# Altium PCB PCB1.PcbDoc
Units mil, origin at the board's own origin, x right, y up, seen from the top; angles counter-clockwise.
Board outline 2030 x 1155 mil, 2 copper layers (Top Layer, Bottom Layer); 37 components, 27 nets, 158 pads, 111 vias.
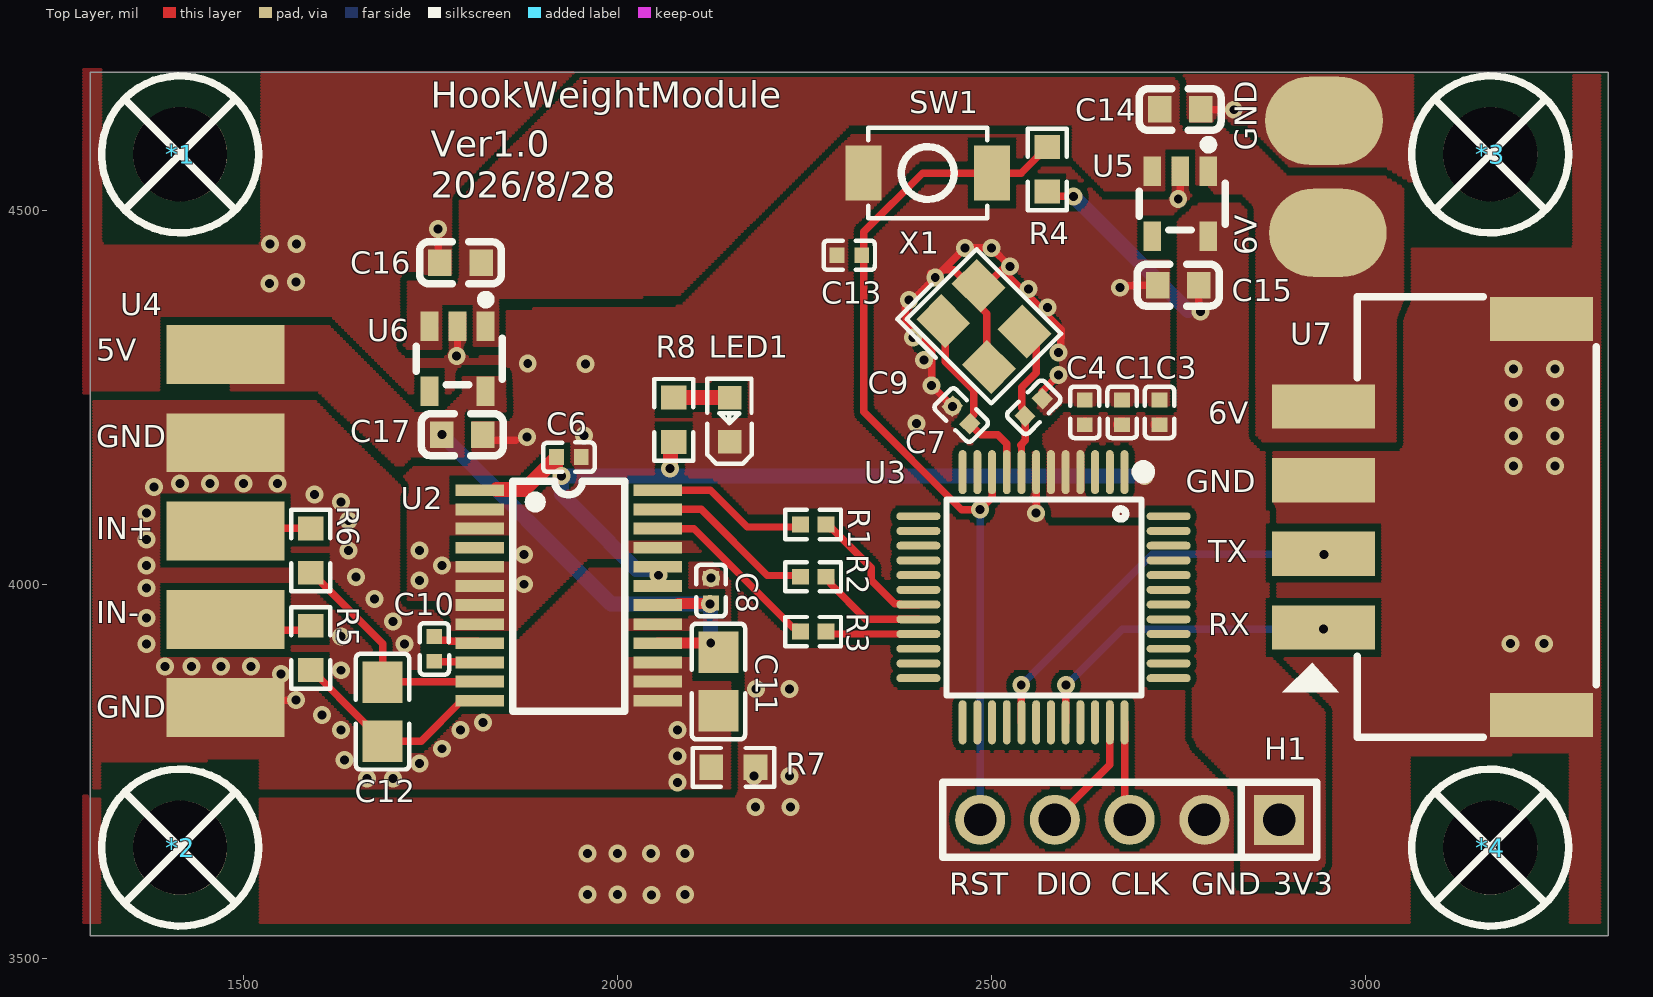
[diagram p0: Top Layer view]
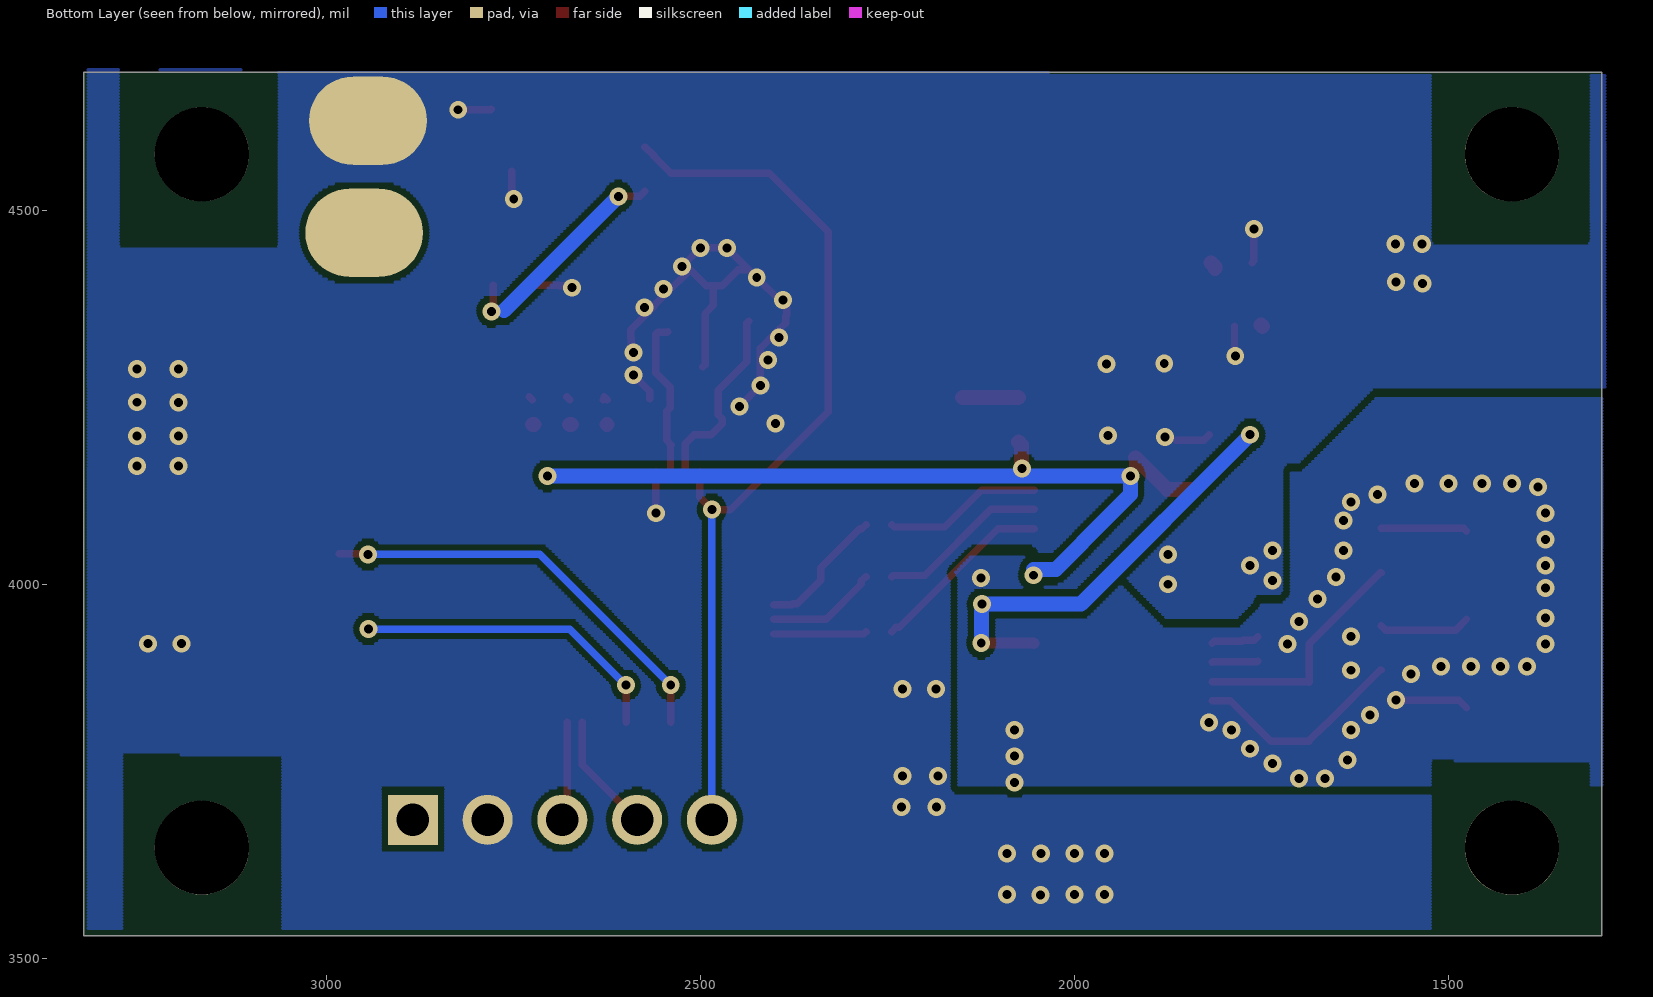
[diagram p1: Bottom Layer view, seen from below]

## Layer stack, top to bottom
Top Solder: solder mask 0.4, Solder Resist, Dk 3.5
Top Layer: signal copper 1.4
Dielectric 1: dielectric 12.6, FR-4, Dk 4.8
Bottom Layer: signal copper 1.4
Bottom Solder: solder mask 0.4, Solder Resist, Dk 3.5

## Board outline
1295,3530 1295,4685 3325,4685 3325,3530

## Design rules (kind name [scope] priority, off if disabled: settings)
Clearance [All] p1: gap=8 ignorepadtopadclearanceinfootprint=FALSE
ComponentClearance [All] p1: gap=0 collisioncheckmode=3 verticalgap=0 showdistances=FALSE
HoleSize [All] p1: absolutevalues=TRUE maxlimit=130 minlimit=1 maxpercent=80.000 minpercent=20.000
MinimumSolderMaskSliver [All] p1: minsoldermaskwidth=4
PlaneConnect [All] p1: planeconnectstyle=Direct reliefexpansion=20 reliefentries=4 reliefconductorwidth=10 reliefairgap=10
PolygonConnect [All] p1: connectstyle=Direct reliefconductorwidth=10 reliefentries=4 polygonreliefangle="90 Angle" airgapwidth=10
RoutingVias [All] p1: holewidth=28 width=50 viastyle="Through Hole" minholewidth=28 minwidth=50 maxholewidth=28 maxwidth=50
SilkToSilkClearance [All] p1: silktosilkclearance=2
SilkToSolderMaskClearance [IsPad] p1: minsilkscreentomaskgap=2 clearancetoexposedcopper=TRUE
SolderMaskExpansion [All] p1: expansion=0 istentingtop=FALSE
SupplyNets "Schematic Supply Nets_2" [InNet('6V')] p1: voltage=0.000
SupplyNets "Schematic Supply Nets" [InNet('3V3')] p2: voltage=0.000
SupplyNets "Schematic Supply Nets_4" [InNet('5V')] p3: voltage=0.000
SupplyNets "Schematic Supply Nets_3" [InNet('DGND')] p4: voltage=0.000
SupplyNets "Schematic Supply Nets_1" [InNet('AGND')] p5: voltage=0.000
Width [All] p1: maxlimit=50 minlimit=10 preferedwidth=10
24 further rules are at their usual default settings.

## Components (designator, comment, footprint, x,y, rotation, side; value= is the part's Value field where it differs from the comment)
*1 "螺丝孔_1" M3螺丝 1415,4575 r0 top
*2 "螺丝孔_1" M3螺丝 1415,3647.74 r0 top
*3 "螺丝孔_1" M3螺丝 3167.2,4575 r0 top
*4 "螺丝孔_1" M3螺丝 3167.2,3647.74 r0 top
C1 "cc0402krx7r7bb104" C0402 2675,4230 r90 top value=100nF
C3 "cc0402krx7r7bb104" C0402 2725,4230 r90 top value=100nF
C4 "cc0402krx7r7bb104" C0402 2625,4230 r270 top value=100nF
C6 "cc0402krx7r7bb104" C0402 1935,4170 r0 top value=100nF
C7 "cc0402jrnpo9bn180" C0402 2556.7,4236.7 r45 top value=18pF
C8 "cc0402krx7r7bb104" C0402 2125,3991.54 r90 top value=100nF
C9 "cc0402jrnpo9bn180" C0402 2459.68,4226.29 r315 top value=18pF
C10 "cc0402krx7r7bb104" C0402 1755,3913.46 r90 top value=100nF
C11 "cl21b103kbannnc" C0805 2135,3870 r270 top value=10nF
C12 "cl21b103kbannnc" C0805 1685.78,3829.55 r270 top value=10nF
C13 "cc0402krx7r7bb104" C0402 2310,4440 r0 top value=100nF
C14 "cga0603x5r105k500jt" C0603 2752.56,4635 r0 top value=1uF
C15 "cga0603x5r105k500jt" C0603 2750,4400 r180 top value=1uF
C16 "cga0603x5r105k500jt" C0603 1790,4430 r180 top value=1uF
C17 "cga0603x5r105k500jt" C0603 1792.44,4200 r0 top value=1uF
H1 "pz254v-11-05p" HDR-TH_5P-P2.54-V-M 2685,3685 r180 top
LED1 "ltst-c190kskt" LED0603-RD 2150,4220 r90 top
R1 "frc0402f47r0ts" R0402 2261.76,4079.9 r0 top value=47Ω
R2 "frc0402f47r0ts" R0402 2261.76,4010.1 r0 top value=47Ω
R3 "frc0402f47r0ts" R0402 2261.76,3936.58 r0 top value=47Ω
R4 "frc0603f1002ts" R0603 2575,4555 r270 top value=10kΩ
R5 "frc0603f1000ts" R0603 1590,3915 r270 top value=100Ω
R6 "frc0603f1000ts" R0603 1590,4045 r270 top value=100Ω
R7 "0603waf0000t5e" R0603 2155,3755 r0 top value=0Ω
R8 "0603waf1001t5e" R0603 2075,4220 r270 top value=1kΩ
SW1 "ts-1088-ar02016" SW-SMD_L3.9-W3.0-P4.45 2415,4550 r0 top
U2 "ads1232ipwr" TSSOP-24_L7.8-W4.4-P0.65-LS6.4-BL 1935,3985 r270 top
U3 "stm32g031c8t6" LQFP-48_L7.0-W7.0-P0.50-LS9.0-BL 2569.84,3982.68 r180 top
U4 "5个焊盘" "5个焊盘 - duplicate" 1475.75,4307.38 r270 top
U5 "tps7a2033pdbvr" SOT-23-5_L2.9-W1.6-P0.95-LS2.8-BR 2752.56,4508.8 r90 top
U6 "tps7a2050pdbvr" SOT-23-5_L2.9-W1.6-P0.95-LS2.8-BR 1786.01,4301.56 r90 top
U7 "bx-xh2.54-4pwt" CONN-SMD_4P-P2.50_BX-XH2.54-4PWT 3090,4090 r90 top
X1 "x32258mob4si" CRYSTAL-SMD_4P-L3.2-W2.5-BL 2490,4345 r315 top value=8MHz

## Footprints (in the part's own frame and the unit in brackets; to place one, negate y for a bottom-side part, rotate by r counter-clockwise, add the part's x,y. Pads: shape width x height; smd on the part's side, far side on the other; paste and mask are expansions set on the pad)
"5个焊盘 - duplicate" [mm]
  rect 2x4 smd: 1(0,0) 2(3,0) 3(6.001,0) 4(9,0) 5(12,0)
C0402 [mm]
  rect 0.5x0.54 smd: 1(-0.42,0) 2(0.42,0)
  silkscreen extent -0.87,-0.5 0.87,0.5
C0603 [mm]
  rect 0.8x0.9 smd: 1(-0.7,0) 2(0.7,0)
  silkscreen extent -1.39,-0.71 1.39,0.71
C0805 [mm]
  rect 1.41x1.35 smd paste-100 mask+0.051: 1(-1,0) 2(1,0)
  silkscreen extent -1.96,-0.9 1.96,0.9
CONN-SMD_4P-P2.50_BX-XH2.54-4PWT [mm]
  rect 1.5x3.5 smd paste+0 mask+0.05: 1(-3.75,3.7) 2(-1.25,3.7) 3(1.25,3.7) 4(3.75,3.7) 5(6.73,-3.7) 6(-6.73,-3.7)
  silkscreen extent -7.49,-5.57 7.49,5.1
CRYSTAL-SMD_4P-L3.2-W2.5-BL [mm]
  rect 1.4x1.2 smd: 1(-1.1,-0.85) 2(1.1,-0.85) 3(1.1,0.85) 4(-1.1,0.85)
  silkscreen extent -2.26,-1.91 2.03,1.68
HDR-TH_5P-P2.54-V-M [mm]
  rect 1.7x1.7 hole 1.1: 1(-5.08,0)
  round 1.7 hole 1.1: 2(-2.54,0) 3(0,0) 4(2.54,0) 5(5.08,0)
  silkscreen extent -6.35,-1.27 6.35,1.27
LED0603-RD [mm]
  rect 0.8x0.8 smd: 1(-0.749,0) 2(0.749,0)
  silkscreen extent -1.49,-0.75 1.39,0.76
LQFP-48_L7.0-W7.0-P0.50-LS9.0-BL [mm]
  oval 0.27x1.5 smd paste+0 mask+0.05: 1(-2.75,-4.25) 2(-2.25,-4.25) 3(-1.75,-4.25) 4(-1.25,-4.25) 5(-0.75,-4.25) 6(-0.25,-4.25) 7(0.25,-4.25) 8(0.75,-4.25) 9(1.25,-4.25) 10(1.75,-4.25) 11(2.25,-4.25) 12(2.75,-4.25) 25(2.75,4.25) 26(2.25,4.25) 27(1.75,4.25) 28(1.25,4.25) 29(0.75,4.25) 30(0.25,4.25) 31(-0.25,4.25) 32(-0.75,4.25) 33(-1.25,4.25) 34(-1.75,4.25) 35(-2.25,4.25) 36(-2.75,4.25)
  oval 1.5x0.27 smd paste+0 mask+0.05: 13(4.25,-2.75) 14(4.25,-2.25) 15(4.25,-1.75) 16(4.25,-1.25) 17(4.25,-0.75) 18(4.25,-0.25) 19(4.25,0.25) 20(4.25,0.75) 21(4.25,1.25) 22(4.25,1.75) 23(4.25,2.25) 24(4.25,2.75) 37(-4.25,2.75) 38(-4.25,2.25) 39(-4.25,1.75) 40(-4.25,1.25) 41(-4.25,0.75) 42(-4.25,0.25) 43(-4.25,-0.25) 44(-4.25,-0.75) 45(-4.25,-1.25) 46(-4.25,-1.75) 47(-4.25,-2.25) 48(-4.25,-2.75)
  silkscreen extent -3.59,-4.46 3.3,3.34
M3螺丝 [mil]
  round 126 hole 126 paste-99999 mask+4: 1(0,0)
  silkscreen extent -105,-105 105,105
R0402 [mm]
  rect 0.566x0.54 smd paste-100 mask+0.051: 1(-0.433,0) 2(0.433,0)
  silkscreen extent -0.94,-0.5 0.94,0.5
R0603 [mil]
  rect 31.75x34.02 smd paste-3937.01 mask+2: 1(-29.66,0) 2(29.66,0)
  silkscreen extent -55,-26 55,26
SOT-23-5_L2.9-W1.6-P0.95-LS2.8-BR [mm]
  rect 1x0.6 smd paste+0 mask+0.05: 1(1.1,-0.95) 2(1.1,0) 3(1.1,0.95) 4(-1.1,0.95) 5(-1.1,-0.95)
  silkscreen extent -0.89,-1.52 2.16,1.4
SW-SMD_L3.9-W3.0-P4.45 [mm]
  rect 1.23x1.86 smd: 1(-2.185,0) 2(2.185,0)
  silkscreen extent -2.03,-1.54 2.03,1.54
TSSOP-24_L7.8-W4.4-P0.65-LS6.4-BL [mm]
  rect 0.4x1.65 smd: 1(-3.575,-3.023) 2(-2.925,-3.023) 3(-2.275,-3.023) 4(-1.625,-3.023) 5(-0.975,-3.023) 6(-0.325,-3.023) 7(0.325,-3.023) 8(0.975,-3.023) 9(1.625,-3.023) 10(2.275,-3.023) 11(2.925,-3.023) 12(3.575,-3.023) 13(3.575,3.023) 14(2.925,3.023) 15(2.275,3.023) 16(1.625,3.023) 17(0.975,3.023) 18(0.325,3.023) 19(-0.325,3.023) 20(-0.975,3.023) 21(-1.625,3.023) 22(-2.275,3.023) 23(-2.925,3.023) 24(-3.575,3.023)
  silkscreen extent -3.89,-1.91 3.94,1.9

## Part data
C1 C3 C4 C6 C8 C10 C13: "容值:100nF;精度:±10%;额定电压:16V;温度系数:X7R;", JLCPCB Part Class="Extended Part", LCSC Part Name="100nF ±10% 16V", Manufacturer=YAGEO(国巨), ManufacturerPart=CC0402KRX7R7BB104, Temperature Coefficient=X7R, Tolerance=±10%, Voltage Rating=16V, AddInBom=yes, ConvertToPcb=yes, Datasheet=https://item.szlcsc.com/datasheet/CC0402KRX7R7BB104/61526.html, FootprintName=C0402, ModelId=36a51122f27c49738f86b3bfa98863e0, ModelName=C0402_L1.0-W0.5-H0.5, ModelTransform=39.37,19.685,0,0,0,0,0,0,0, Supplier=LCSC, Supplier Footprint=0402, SupplierPart=C60474, Symbol=CC0402KRX7R7BB104
C7 C9: "容值:18pF;精度:±5%;额定电压:50V;温度系数:NP0;", JLCPCB Part Class="Extended Part", LCSC Part Name="18pF ±5% 50V", Manufacturer=YAGEO(国巨), ManufacturerPart=CC0402JRNPO9BN180, Temperature Coefficient=NP0, Tolerance=±5%, Voltage Rating=50V, AddInBom=yes, ConvertToPcb=yes, Datasheet=https://item.szlcsc.com/datasheet/CC0402JRNPO9BN180/107417.html, FootprintName=C0402, ModelId=36a51122f27c49738f86b3bfa98863e0, ModelName=C0402_L1.0-W0.5-H0.5, ModelTransform=39.37,19.685,0,0,0,0,0,0,0, Supplier=LCSC, Supplier Footprint=0402, SupplierPart=C106202, Symbol=CC0402JRNPO9BN180
C11 C12: "容值:10nF;精度:±10%;额定电压:50V;温度系数:X7R;", JLCPCB Part Class="Basic Part", LCSC Part Name="10nF ±10% 50V", Manufacturer=SAMSUNG(三星), ManufacturerPart=CL21B103KBANNNC, Temperature Coefficient=X7R, Tolerance=±10%, Voltage Rating=50V, AddInBom=yes, ConvertToPcb=yes, Datasheet=https://item.szlcsc.com/datasheet/CL21B103KBANNNC/2062.html, FootprintName=C0805, ModelId=1ba041120af144c991958decab20d241, ModelName=C0805_L2.0-W1.3-H1.3, ModelTransform=78.74,51.181,0,0,0,0,0,0.0005,0, Supplier=LCSC, Supplier Footprint=0805, SupplierPart=C1710, Symbol=CL21B103KBANNNC
C14 C15 C16 C17: "容值:1uF;精度:±10%;额定电压:50V;温度系数:X5R;", JLCPCB Part Class="Extended Part", LCSC Part Name="1uF ±10% 50V 停产", Manufacturer=HRE(芯声), ManufacturerPart=CGA0603X5R105K500JT, Temperature Coefficient=X5R, Tolerance=±10%, Voltage Rating=50V, AddInBom=yes, ConvertToPcb=yes, Datasheet=https://item.szlcsc.com/datasheet/CGA0603X5R105K500JT/7062558.html, FootprintName=C0603, ModelId=ac125912035d415993ca9572d50418b1, ModelName=C0603_L1.6-W0.8-H0.8, ModelTransform=62.992,31.496,0,0,0,0,0,0,0, Supplier=LCSC, Supplier Footprint=0603, SupplierPart=C6119852, Symbol=CGA0603X5R105K500JT
H1: "插针结构:1x5P;间距:2.54mm;行距:-;圆针/方针:方针;安装方式:直插;排数:单排;总PIN位数:5P;额定电流:3A;额定电压:250V;配合针长度:6mm;塑高:2.5mm;端接针长度:3mm;触头材质:黄铜;触头镀层:-;工作温度:-40℃~+105℃;颜色:黑色;", Color=黑色, Current Rating=3A, JLCPCB Part Class="Extended Part", LCSC Part Name="1x5P 间距:2.54mm 方针 直插", Manufacturer=XFCN(兴飞), ManufacturerPart=PZ254V-11-05P, Operating Temperature=-40℃~+105℃, Voltage Rating (Max)=250V, AddInBom=yes, Circluar Pins/Square Pins=方针, Contact Material=黄铜, Contact Plating=-, ConvertToPcb=yes, Datasheet=https://item.szlcsc.com/datasheet/PZ254V-11-05P/502960.html, FootprintName=HDR-TH_5P-P2.54-V-M, Insulation Height=2.5mm, Length of End Connection Pin=3mm, Length of Mating Pin=6mm, ModelId=47d466e4a34f4fc5bc626cf773a24dd5, ModelName=HDR-TH_5P-P2.54-M-LI-1X5P, ModelTransform=499.999,100,0,0,0,0,0,0,-118.11, Mounting Type=直插, Number of Pins=5P, Number of Rows=单排, Pin Structure=1x5P, Pitch=2.54mm, Row Spacing=-, Supplier=LCSC, Supplier Footprint=插件,P=2.54mm, SupplierPart=C492404, Symbol=PZ254V-11-05P
LED1: "灯头类型:-;发光颜色:黄色;正向压降(Vf):2.1V;功率:75mW;正向电流:20mA;波长:584.5nm~597nm;二极管配置:独立二极管;透镜颜色:无色透明透镜;色温:-;发光强度:104mcd;发光角度:130°;载带方式:-;工作温度:-30℃~+85℃;", Color Temperature=-, Forward Current=20mA, Illumination Color=黄色, JLCPCB Part Class="Extended Part", LCSC Part Name=黄灯, Lens Color=无色透明透镜, Manufacturer=LITEON(光宝), ManufacturerPart=LTST-C190KSKT, Operating Temperature=-30℃~+85℃, Power(Watts)=75mW, Voltage - Forward(Vf)=2.1V, AddInBom=yes, ConvertToPcb=yes, Datasheet=https://item.szlcsc.com/datasheet/LTST-C190KSKT/136371.html, Diode Configuration=独立二极管, FootprintName=LED0603-RD, Lamp Holder Type=-, Luminous Intensity=104mcd, ModelId=1f0d29a91be547639d425604e9b96ebb, ModelName=LED0603-RD, ModelTransform=63.7794,32.283,0,0,0,0,0,0,0, Mounting Style=-, Peak Wavelength=588nm, Supplier=LCSC, Supplier Footprint=0603, SupplierPart=C125095, Symbol=LTST-C190KSKT, Viewing Angle=130°, Wavelength - Dominant=584.5nm~597nm
R1 R2 R3: "电阻类型:厚膜电阻;阻值:47Ω;精度:±1%;功率:62.5mW;工作电压:50V;温度系数:±100ppm/℃;", JLCPCB Part Class="Extended Part", LCSC Part Name="47Ω ±1% 62.5mW 厚膜电阻", Manufacturer=FOJAN(富捷), ManufacturerPart=FRC0402F47R0TS, Operating Temperature=-55℃~+155℃, Power(Watts)=62.5mW, Temperature Coefficient=±100ppm/℃, Tolerance=±1%, Voltage-Supply(Max)=50V, AddInBom=yes, ConvertToPcb=yes, Datasheet=https://item.szlcsc.com/datasheet/FRC0402F47R0TS/3186297.html, FootprintName=R0402, ModelId=98c88bc2b9094f218f3a3e30a7012738, ModelName=R0402_L1.0-W0.5-H0.4, ModelTransform=39.37,19.685,0,0,0,0,0,0,0, Supplier=LCSC, Supplier Footprint=0402, SupplierPart=C2909362, Symbol=FRC0402F47R0TS, Type=厚膜电阻
R4: "电阻类型:厚膜电阻;阻值:10kΩ;精度:±1%;功率:100mW;工作电压:75V;温度系数:±100ppm/℃;", JLCPCB Part Class="Extended Part", LCSC Part Name="10kΩ ±1% 100mW 厚膜电阻", Manufacturer=FOJAN(富捷), ManufacturerPart=FRC0603F1002TS, Operating Temperature=-55℃~+155℃, Power(Watts)=100mW, Temperature Coefficient=±100ppm/℃, Tolerance=±1%, Voltage-Supply(Max)=75V, AddInBom=yes, ConvertToPcb=yes, Datasheet=https://item.szlcsc.com/datasheet/FRC0603F1002TS/3180495.html, FootprintName=R0603, ModelId=fc143cca1e79419f9cd78b61e9279f08, ModelName=R0603, ModelTransform=31.8897,63.7794,0,90,0,0,0,0,0, Supplier=LCSC, Supplier Footprint=0603, SupplierPart=C2906982, Symbol=FRC0603F1002TS, Type=厚膜电阻
R5 R6: "电阻类型:厚膜电阻;阻值:100Ω;精度:±1%;功率:100mW;工作电压:75V;温度系数:±100ppm/℃;", JLCPCB Part Class="Extended Part", LCSC Part Name="100Ω ±1% 100mW 厚膜电阻", Manufacturer=FOJAN(富捷), ManufacturerPart=FRC0603F1000TS, Operating Temperature=-55℃~+155℃, Power(Watts)=100mW, Temperature Coefficient=±100ppm/℃, Tolerance=±1%, Voltage-Supply(Max)=75V, AddInBom=yes, ConvertToPcb=yes, Datasheet=https://item.szlcsc.com/datasheet/FRC0603F1000TS/3180494.html, FootprintName=R0603, ModelId=fc143cca1e79419f9cd78b61e9279f08, ModelName=R0603, ModelTransform=31.8897,63.7794,0,90,0,0,0,0,0, Supplier=LCSC, Supplier Footprint=0603, SupplierPart=C2906981, Symbol=FRC0603F1000TS, Type=厚膜电阻
R7: "电阻类型:厚膜电阻;阻值:0Ω;精度:±1%;功率:100mW;工作电压:75V;温度系数:-;", JLCPCB Part Class="Basic Part", LCSC Part Name="0Ω ±1% 100mW 厚膜电阻", Manufacturer=UNI-ROYAL(厚声), ManufacturerPart=0603WAF0000T5E, Operating Temperature=-55℃~+155℃, Power(Watts)=100mW, Temperature Coefficient=-, Tolerance=±1%, Voltage-Supply(Max)=75V, AddInBom=yes, ConvertToPcb=yes, Datasheet=https://item.szlcsc.com/datasheet/0603WAF0000T5E/21903.html, FootprintName=R0603, ModelId=fc143cca1e79419f9cd78b61e9279f08, ModelName=R0603, ModelTransform=31.8897,63.7794,0,90,0,0,0,0,0, Supplier=LCSC, Supplier Footprint=0603, SupplierPart=C21189, Symbol=0603WAF0000T5E, Type=厚膜电阻
R8: "电阻类型:厚膜电阻;阻值:1kΩ;精度:±1%;功率:100mW;工作电压:75V;温度系数:±100ppm/℃;", JLCPCB Part Class="Basic Part", LCSC Part Name="1kΩ ±1% 100mW 厚膜电阻", Manufacturer=UNI-ROYAL(厚声), ManufacturerPart=0603WAF1001T5E, Operating Temperature=-55℃~+155℃, Power(Watts)=100mW, Temperature Coefficient=±100ppm/℃, Tolerance=±1%, Voltage-Supply(Max)=75V, AddInBom=yes, ConvertToPcb=yes, Datasheet=https://item.szlcsc.com/datasheet/0603WAF1001T5E/21904.html, FootprintName=R0603, ModelId=fc143cca1e79419f9cd78b61e9279f08, ModelName=R0603, ModelTransform=31.8897,63.7794,0,90,0,0,0,0,0, Supplier=LCSC, Supplier Footprint=0603, SupplierPart=C21190, Symbol=0603WAF1001T5E, Type=厚膜电阻
SW1: "电路结构:单刀单掷;按钮形状:圆形按钮;作用力:1.6N;安装方式:立贴;开关长度:3.9mm;开关宽度:3mm;开关高度:2mm;带支架:不带支架;触点电流:50mA;额定电压:12V;带灯:-;工作寿命:10万次;", Actuator/Cap Color=黑色, Contact Current=50mA, IP Rating=-, JLCPCB Part Class="Basic Part", LCSC Part Name="3.9*3*2mm 立贴 轻触开关", Manufacturer=XUNPU(讯普), ManufacturerPart=TS-1088-AR02016, Operating Force=1.6N, Operating Temperature=-30℃~+80℃, Voltage Rating=12V, Actuator Style=圆形按钮, AddInBom=yes, Circuit=单刀单掷, ConvertToPcb=yes, Datasheet=https://item.szlcsc.com/datasheet/TS-1088-AR02016/763484.html, FootprintName=SW-SMD_L3.9-W3.0-P4.45, Length=3.9mm, Life=10万次, ModelId=b26698b69f274ffabef8a26c7d0e5dd1, ModelName=SW-SMD_L3.9-W2.9-H2.0-LS4.8, ModelTransform=188.976,114.174,0,0,0,0,0,0,0, Mounting Type=立贴, Supplier=LCSC, Supplier Footprint=SMD,4x3mm, SupplierPart=C720477, Switch Height=2mm, Symbol=TS-1088-AR02016, Termination Style=SMD接片, Width=3mm, with Bracket=不带支架, With Lamp=-
U2: "分辨率(位):24;采样率:10Hz;工作电压:2.7V~5.3V;接口类型:SPI;", Clock Frequency=4.9152MHz；200kHz~8MHz, JLCPCB Part Class="Extended Part", LCSC Part Name="用于桥式传感器的24bit 模数转换器", Manufacturer=TI(德州仪器), ManufacturerPart=ADS1232IPWR, Operating Temperature=-40℃~+105℃, Quiescent Current (Iq)=1.3uA, Temperature Sensors=内置, Voltage - Supply=2.7V~5.3V, Voltage Reference=外置, Voltage Reference Drift=-, ADC architecture=Sigma-Delta, AddInBom=yes, Clock/Oscillator=内置；外置, ConvertToPcb=yes, Data rate=80Hz；10Hz, Datasheet=https://www.ti.com/cn/lit/gpn/ads1232, differential input=是, FootprintName=TSSOP-24_L7.8-W4.4-P0.65-LS6.4-BL, Full-Scale Range(FSR)=39mV；1.25V；19.5mV；2.5V, Integral non - linearity=-, Interface=SPI, ModelId=57e278220af748a2882c4abba4094eb9, ModelName=TSSOP-24_L7.8-W4.4-H1.0-LS6.4-P0.65, ModelTransform=252.188,307.086,0,90,0,0,0,0,0, number of channels=2, Programmable Gain=支持, Resolution (Bits)=24, Sampling Rate=10Hz, Signal-to-Noise Ratio=-, Supplier=LCSC, Supplier Footprint=TSSOP-24, SupplierPart=C27919, Symbol=ADS1232IPW
U3: "CPU内核:ARM Cortex-M0+;CPU最大主频:64MHz;CPU位数:32 Bit;", JLCPCB Part Class="Extended Part", LCSC Part Name="主流Arm Cortex-M0+ MCU，具有64 KB Flash存储器、8 KB RAM、64 MHz CPU、2x USART、定时器、ADC和通信接口，1.7-3.6V", Manufacturer=ST(意法半导体), ManufacturerPart=STM32G031C8T6, Operating Temperature=-40℃~+85℃, Voltage - Supply=1.7V~3.6V, ADC (Bit)=12bit, AddInBom=yes, ConvertToPcb=yes, Core Size="32 Bit", CPU Core="ARM Cortex-M0+", CPU Maximum Speed=64MHz, Datasheet=https://item.szlcsc.com/datasheet/STM32G031C8T6/428993.html, EEPROM=-, FootprintName=LQFP-48_L7.0-W7.0-P0.50-LS9.0-BL, ModelId=093be70396ff421eb2cdb946d5311efc, ModelName=LQFP-48_L7.0-W7.0-H1.4-LS9.0-P0.50, ModelTransform=354.331,354.331,0,0,0,0,0,0,0, Number of I/O=44, Oscillator Type=内置+外置, Program Memory Type=FLASH, Program Storage Size=64KB, RAM Size=8KB, Supplier=LCSC, Supplier Footprint=LQFP-48(7x7), SupplierPart=C432205, Symbol=STM32G031C8T6
U5: "输出类型:固定;最大输入电压:6V;输出电压:3.3V;输出电流:300mA;输出极性:正极;", Dropout Voltage=140mV@(300mA), JLCPCB Part Class="Extended Part", LCSC Part Name="具有高 PSRR 的 300mA、超低噪声、低 IQ、低压降 (LDO) 线性稳压器", Manufacturer=TI(德州仪器), ManufacturerPart=TPS7A2033PDBVR, Maximum Input Voltage=6V, Operating Temperature=-40℃~+125℃@(Tj), Output Current=300mA, Output Voltage=3.3V, standby current=15uA, AddInBom=yes, ConvertToPcb=yes, Datasheet=https://www.ti.com/cn/lit/gpn/tps7a20, Feature=防静电保护；软启动；浪涌保护；低ESR；热保护(TSD)；欠压闭锁；过流保护(OCP)；带使能；防倒灌, FootprintName=SOT-23-5_L2.9-W1.6-P0.95-LS2.8-BR, ModelId=7ba65df16e7b4570af156e925f9c37fe, ModelName=SOT-23-5_L2.9-W1.6-P0.95-LS2.8-BR, ModelTransform=114.173,114.173,0,90,0,0,0,0,0, Number of Outputs=1, Output Polarity=正极, Output Type=固定, Supplier=LCSC, Supplier Footprint=SOT-23-5, SupplierPart=C2862740, Symbol=TPS7A2033PDBVR
U6: "输出极性:正极;工作电压:6V;输出电压:5V;输出电流:300mA;电源纹波抑制比(PSRR):65dB@(100Hz);输出类型:固定;", JLCPCB Part Class="Extended Part", LCSC Part Name="800mV~5.5V 300mA 6V", Manufacturer=TI(德州仪器), ManufacturerPart=TPS7A2050PDBVR, Operating Temperature=-40℃~+125℃@(Tj), Output Current=300mA, Output Voltage=5V, Power Supply Rejection Ratio (PSRR)=65dB@(100Hz), standby current=6.5uA, Voltage - Supply=6V, Voltage Dropout=140mV@(300mA), AddInBom=yes, ConvertToPcb=yes, Datasheet=https://www.ti.com/cn/lit/ds/symlink/tps7a20.pdf, Features=使能控制；输入欠压保护；内置软启动；短路保护；过流保护；输出放电；热关断, FootprintName=SOT-23-5_L2.9-W1.6-P0.95-LS2.8-BR, ModelId=7ba65df16e7b4570af156e925f9c37fe, ModelName=SOT-23-5_L2.9-W1.6-P0.95-LS2.8-BR, ModelTransform=114.173,114.173,0,90,0,0,0,0,0, Noise=10uVrms, Number of Outputs=1, Output Configuration=正极, Output Type=固定, Supplier=LCSC, Supplier Footprint=SOT-23-5, SupplierPart=C2864504, Symbol=TPS7A2050PDBVR
U7: "插针结构:1x4P;间距:2.5mm;安装方式:卧贴;参考系列:XH;总PIN数:4P;排数:1;每排PIN数:4;行距:-;额定电流:3A;触头材质:黄铜;触头镀层:锡;工作温度:-25℃~+85℃;", Color=米色, Current Rating=3A, Flame Retardant Rating=-, JLCPCB Part Class="Extended Part", LCSC Part Name="1x4P 间距:2.5mm 卧贴 系列:XH", Manufacturer=Bossie(博锡), ManufacturerPart=BX-XH2.54-4PWT, Operating Temperature=-25℃~+85℃, Voltage Rating=250V, AddInBom=yes, Contact Material=黄铜, Contact Plating=锡, ConvertToPcb=yes, Datasheet=https://item.szlcsc.com/datasheet/BX-XH2.54-4PWT/19218275.html, FootprintName=CONN-SMD_4P-P2.50_BX-XH2.54-4PWT, ModelId=fc4292fdbd0c45d68488b12ac9a84ffb, ModelName=CONN-SMD_4P-P2.50_BX-XH2.54-4PWT, ModelTransform=590.55,413.385,0,0,0,0,-0.003,-11.339,0, Mounting Type=卧贴, Number of Pins=4P, Number of PINs Per Row=4, Number of Rows=1, Pins Structure=1x4P, Pitch=2.5mm, Plastic Material=-, Reference Series=XH, Row Spacing=-, Supplementary Features=辅助焊脚, Supplier=LCSC, Supplier Footprint=SMD,P=2.54mm,卧贴, SupplierPart=C18077874, Symbol=BX-XH2.54-4PWT, X-Length of Bottom Edge on Board (Spacing Line)=15mm, Y-Width of Bottom Edge on Board=10.5mm, Z-Height of the Board=6.2mm
X1: "晶振类型:贴片晶振;频率:8MHz;常温频差:±10ppm;负载电容:12pF;频率稳定度:±20ppm;", Equivalent Series Resistance(ESR)=180Ω, Frequency Stability=±20ppm, JLCPCB Part Class="Extended Part", LCSC Part Name="YSX321SL 8MHZ 4P 3225 12PF ±10PPM -40~85℃ (±20PPM)", Load Capacitance=12pF, Manufacturer=YXC(扬兴晶振), ManufacturerPart=X32258MOB4SI, Normal temperature Frequency Tolerance=±10ppm, Operating Temperature=-40℃~+85℃, AddInBom=yes, ConvertToPcb=yes, Datasheet=https://item.szlcsc.com/datasheet/X32258MOB4SI/2777872.html, FootprintName=CRYSTAL-SMD_4P-L3.2-W2.5-BL, ModelId=ff2dfd5650294453a14147960efe1838, ModelName=CRYSTAL-SMD_4P-L3.2-W2.5-BL, ModelTransform=125.984,98.425,0,0,0,0,0,0,0, Supplier=LCSC, Supplier Footprint=SMD3225-4P, SupplierPart=C2682775, Symbol=X32258MOB4SI, Type=贴片晶振
U4: Add into BOM=yes, Convert to PCB=yes, Device=5个焊盘, Symbol=5个焊盘

## Free pads (board coordinates)
  oval 157.48x118.11 all layers, no hole: 7(2945,4620) 7(2950,4470)

## Via types
v1: diameter 24, hole 12, Top Layer to Bottom Layer, tented both sides, 111 vias

## Nets (pads, with @x,y where several pads share a name; then routed paths per layer and width w, separated by ;. In a path a pad name is that pad's centre, name@x,y a point inside that pad or via, vN(x,y) a via of type N, cw(c..) or ccw(c..) an arc to the next point about the centre after c; other vN are vias at no path point)
3V3: C1.1 C3.1 C4.2 C6.1 C15.1 H1.1 R4.2 R8.2 U2.1 U2.19 U2.20 U3.4 U3.5 U3.6 U5.5 | length 1451.3
  Top Layer w10: C6.1@1918.46,4169.21 1922.32,4165.35 1922.32,4147.68 v1(1925,4145) ; R4.2 2581.6,4518.74 v1(2610.11,4518.74) ; C15.1 2777.56,4367.44 v1(2780,4365)
  Top Layer w20: U2.1@1838.48,4126.91 1876.16,4126.91 C6.1@1918.46,4169.21 ; v1(2070,4155) 2070.77,4155.77 2070.77,4186.11 R8.2 ; C4.2 C4.2@2625.47,4213.46 ; C1.1@2672.74,4213.46 C1.1 C1.1@2675.47,4213.46 ; C3.1@2722.74,4213.46 C3.1
  Bottom Layer w10: 1990,4054.75 1990,4055.36 ; 2762.83,4366.01 2778.99,4366.01 v1(2780,4365)
  Bottom Layer w20: 1990,4054.75 2024.75,4020 v1@2055,4020 ; 1990,4055.36 1925,4120.36 v1(1925,4145) v1(2705,4145) ; v1(2610.11,4518.74) 2762.83,4366.01
  other v1: 2055.03,4012.07
5V: C8.1 C11.1 C17.1 U2.16 U2.18 U4.1 U6.5 | length 648.9
  Top Layer w10: v1(2123.61,3973.61) C8.1
  Top Layer w15: U2.16 2054.26,3921.28 v1(2124.74,3921.28) ; U2.18 2078.61,3972.21 2080.81,3974.42 2122.79,3974.42 v1(2123.61,3973.61)
  Bottom Layer w10: v1(2123.61,3973.61) v1@2124.17,3973.04 ; v1@2124.17,3921.85 v1(2124.74,3921.28)
  Bottom Layer w20: v1(1765,4200) 1991.39,3973.61 v1(2123.61,3973.61) ; v1@2124.17,3921.85 v1@2124.17,3973.04
6V: C14.1 C16.1 pad.7@2950,4470 U5.1 U5.3 U6.1 U6.3 U7.4 | length 12.7
  Top Layer w20: U6.3 U6.3@1750.43,4346.68 ; C16.1@1811.81,4422.28 1811.81,4424.25 C16.1
AGND: C8.2 C11.2 R7.1 U2.13 U2.14 U2.15 U2.17 U4.2 U4.5 | length 98.4
  Top Layer w10: U4.5 1485.81,3845 v1(1570,3845)
  other v1: 2080,3735 1665,3740 1700,3740 1735,3760 1635,3765 2080,3770 1765,3780 1630,3805 1790,3805 2080,3805 1820,3815 1605,3825 1550,3880 1630,3885 1395,3890 1430,3890 1470,3890 1510,3890 1370,3920 1715,3920 1630,3930 1700,3950 1370,3955 1675,3980 1370,3995 2125,4008.08 1650,4010 1370,4025 1640,4045 1370,4060 1640,4085 1370,4095 1630,4110 1595,4120 1380,4130 1415,4135 1455,4135 1500,4135 1545,4135
AINN1: R5.1 U4.4 | length 140.4
  Top Layer w10: U4.4 1490.33,3938.46 R5.1@1583.8,3938.46 ; R5.1@1583.8,3938.46 R5.1 ; R5.1@1583.8,3938.46 R5.1 ; R5.1@1583.8,3938.46 R5.1
AINP1: R6.1 U4.3 | length 115.7
  Top Layer w10: U4.3 1479.27,4074.66 R6.1
DGND: C1.2 C3.2 C4.1 C6.2 C7.2 C9.1 C13.1 C14.2 C15.2 C16.2 C17.2 H1.2 LED1.1 pad.7@2945,4620 R7.2 SW1.1 U2.2 U2.3 U2.5 U2.6 U2.7 U2.8 U2.21 U3.7 U5.2 U6.2 U7.3 U7.5 U7.6 X1.2 X1.4 | length 1116.2
  Top Layer w10: v1(1760,4475) 1760,4432.44 C16.2 ; v1(1785,4305) 1786.02,4306.02 U6.2 ; C17.2 1827.34,4192.66 1864.15,4192.66 ; v1(2390,4380) v1@2392.5,4377.5 ; v1(2395,4330) v1@2400.44,4335.44 ; v1@2419.14,4415.86 v1(2425,4410) ; v1(2447.98,4237.98) v1(2420,4265.96) 2420,4315.88 v1@2400.44,4335.44 ; X1.2 2494.18,4293.5 2494.18,4361.81 2483.04,4372.95 X1.4 ; v1(2525,4425) v1(2500,4450) v1(2465,4450) 2435.86,4420.86 ; v1(2550,4395) v1@2545,4390 ; v1(2560,4095) U3.7 ; C7.2 2567.83,4248.95 2567.83,4255.8 2568.39,4256.35 2568.39,4258.39 v1(2590,4280) ; v1(2590,4310) 2592.68,4312.68 2592.68,4329.07 2593.48,4329.87 2593.48,4340.64 2562.06,4372.06 2562.06,4372.94 v1@2545,4390 ; C4.1 2629.23,4250.77 2629.23,4247.94 C4.1@2630.63,4246.54 ; v1(2672.21,4396.6) 2674.88,4399.28 2689.28,4399.28 2690,4400 C15.2 ; C3.2 C3.2@2729.23,4250.77 ; v1(2750,4515) 2752.57,4517.56 U5.2 ; C14.2 2780.48,4634.64 v1(2824.25,4634.64) ; v1@2392.5,4377.5 2385,4370 2385,4360 2386.52,4358.48 2386.52,4349.36 v1@2400.44,4335.44 ; v1@2392.5,4377.5 v1(2425,4410) ; v1(2425,4410) 2435.86,4420.86 ; 2435.86,4420.86 2449.5,4420.86 2471.07,4399.29 X1.4 ; X1.4 2492.57,4399.29 2514.14,4420.86 v1@2545,4390 ; C1.2 2679.23,4250.77 C1.2
  other v1: 1960,3585 2000,3585 2045.24,3584.54 2090,3585 1960,3640 2000,3640 2045,3640 2090,3640 2184.44,3702.22 2231.16,3701.9 2182.87,3743.61 2229.91,3743.61 2185,3860 2230,3860 3194.27,3920.47 3239.27,3920.47 1875,4000 1735,4005 1765,4025 1875,4040 1735,4045 3198.6,4158.19 3253.6,4158.19 1878.69,4196.86 3198.6,4198.19 3253.6,4198.19 1954.92,4199.01 2400,4215 3198.6,4243.19 3254.06,4243.44 3198.6,4288.19 3253.6,4288.19 1880,4295 1957.05,4294.87 2410,4300 2575,4370 1534.72,4402.35 1570.25,4404.08 1535,4455 1570.83,4454.92
DOUT: R1.2 U3.19 | length 177.7
  Top Layer w10: R1.2 2284.43,4074.27 2287.1,4074.27 2339.33,4022.05 2339.33,4005.6 2370.72,3974.2 2376.77,3974.2 2378.14,3972.84 U3.19
NetC7_1: C7.1 U3.8 X1.3 | length 214.9
  Top Layer w10: U3.8 U3.8 2540.35,4157.44 2540.35,4184.95 2539.11,4186.19 2545.56,4192.63 2545.56,4231.29 2540.91,4235.93 2540.91,4263.56 2560.11,4282.75 2560.11,4334.54 2557.33,4337.33 2545,4337.33 X1.3
NetC9_2: C9.2 U3.9 X1.1 | length 254.5
  Top Layer w10: X1.1 2438.5,4349.18 2438.5,4297.39 2476.34,4259.54 2476.34,4226.41 2471.37,4221.44 C9.2 2486.12,4199.85 2508.69,4199.85 2520.67,4187.86 2520.67,4157.44 2520.67,4150.04 U3.9
NetC10_1: C10.1 U2.10 | length 61.6
  Top Layer w10: C10.1 1755.74,3896.18 1815.25,3896.18 U2.10
NetC10_2: C10.2 U2.9 | length 64.7
  Top Layer w10: C10.2 1759.84,3925.16 1774.84,3925.16 1776.11,3923.89 1813.13,3923.89 U2.9
NetC12_1: C12.1 R6.2 U2.11 | length 317.4
  Top Layer w10: R6.2 1591.13,4015.34 1685.78,3920.69 C12.1 1686.7,3869.84 U2.11
NetC12_2: C12.2 R5.2 U2.12 | length 288.5
  Top Layer w10: R5.2 1591.13,3885.34 1663.53,3812.94 1664.21,3812.94 1685.78,3791.37 C12.2 1737.32,3790.18 1791.39,3844.26 U2.12
NetLED1_2: LED1.2 R8.1 | length 75.1
  Top Layer w20: R8.1 2075.09,4249.57 2149.91,4249.57 LED1.2
NetR1_1: R1.1 U2.24 | length 212.4
  Top Layer w10: U2.24 2124.37,4125.74 2173.51,4076.6 2241.41,4076.6 R1.1
NetR2_1: R2.1 U2.23 | length 228
  Top Layer w10: U2.23 2111.84,4100.15 2200.28,4011.71 2243.1,4011.71 R2.1
NetR3_1: R3.1 U2.22 | length 247.9
  Top Layer w10: U2.22 2102.21,4074.56 2234.55,3942.21 2239.09,3942.21 R3.1
NRST: C13.2 H1.5 R4.1 SW1.2 U3.10 | length 1214.7
  Top Layer w10: v1@2485,4099.91 2460.11,4099.91 2329.52,4230.5 2329.52,4471.33 2408.19,4550 SW1.2 2540.23,4550 2562.99,4572.76 2562.99,4573.78 2573.87,4584.66 R4.1 ; v1@2485,4100.37 2500.94,4116.31 U3.10
  Bottom Layer w10: H1.5 v1(2485,4100)
PDWN: R3.2 U3.21 | length 125
  Top Layer w10: R3.2 2281.91,3933.47 U3.21
SCLK: R2.2 U3.20 | length 149.6
  Top Layer w10: R2.2 2279.3,4010.1 2284.93,4004.47 2284.93,4000.51 2332.3,3953.15 U3.20
SWCLK: H1.3 U3.36 | length 133.2
  Top Layer w10: U3.36 2678.23,3815.24 2678.23,3691.77 H1.3
SWDIO: H1.4 U3.35 | length 160.8
  Top Layer w10: H1.4 2658.42,3758.42 U3.35
USART1_RX: U3.32 U7.1 | length 426.3
  Top Layer w10: U3.32 2599.37,3864.37 v1(2600,3865) ; U7.1@2943.55,3942.36 U7.1
  Bottom Layer w10: v1(2600,3865) 2675,3940 2944.44,3940 v1(2944.49,3940.05)
USART1_TX: U3.29 U7.2 | length 566.6
  Top Layer w10: v1(2540,3865) 2540.31,3864.69 U3.29 ; U7.2 U7.2@2983.7,4040.78
  Bottom Layer w10: v1(2540,3865) 2715,4040 v1(2945,4040)
USART2_RX: U3.14
USART2_TX: U3.13
pads on no net: *1.1 *2.1 *3.1 *4.1 U2.4 U3.1 U3.2 U3.3 U3.11 U3.12 U3.15 U3.16 U3.17 U3.18 U3.22 U3.23 U3.24 U3.25 U3.26 U3.27 U3.28 U3.30 U3.31 U3.33 U3.34 U3.37 U3.38 U3.39 U3.40 U3.41 U3.42 U3.43 U3.44 U3.45 U3.46 U3.47 U3.48 U5.4 U6.4

## Polygon pours and split planes (outlines as drawn)
DGND on Top Layer "NONET_L-01_P-001" (hatched Horizontal grid 4 track 5, remove dead copper, pour order 15): 1286.25,4688.2 1286.25,3545 3313.75,3545 3313.75,4680.69
6V on Top Layer "NONET_L-01_P-001" (hatched Horizontal grid 4 track 5, remove dead copper, pour order 26): 2865,4190 2875,4430 2790,4535 2770,4535 2770,4580 2765,4575 2735,4575 2735,4535 2725,4525 2655,4525 2610,4570 2610,4615 2310,4615 2080,4385 1840,4380 1840,4320 1800,4315 1800,4375 1775,4375 1770,4370 1770,4315 1720,4315 1715,4320 1720,4325 1720,4405 1785,4405 1790,4410 1790,4515 1950,4515 2115,4680 2740,4680 2750,4670 2750,4615 2805,4615 2885,4535 3040,4535 3040,4430 3030,4190
3V3 on Top Layer "NONET_L-01_P-001" (hatched Horizontal grid 4 track 5, remove dead copper, pour order 25): 2770,4505 2750,4485 2750,4230 2745,4225 2605,4225 2605,4220 2570,4185 2575,4180 2575,4090 2695,4090 2710,4105 2775,4105 2775,3785 2835,3725 2835,3600 2935,3600 2930,3755 2870,3825 2870,4450 2815,4505
3V3 on Top Layer "NONET_L-01_P-001" (hatched Horizontal grid 4 track 5, remove dead copper, pour order 24): 2780,4510 2755,4485 2755,4320 2755,4310 2760,4305 2760,4230 2600,4230 2570,4200 2570,4105 2580,4095 2710,4095 2725,4110 2770,4110 2770,3795 2835,3730 2835,3615 2935,3615 2945,3625 2945,3830 2840,3935 2840,4500 2830,4510
6V on Top Layer "NONET_L-01_P-001" (hatched Horizontal grid 4 track 5, remove dead copper, pour order 23): 1800,4470 1800,4390 1735,4390 1725,4380 1730,4375 1730,4315 1770,4315 1775,4310 1775,4375 1785,4375 1805,4355 1805,4325 1855,4325 1860,4330 1860,4465
6V on Top Layer "NONET_L-01_P-001" (hatched Horizontal grid 4 track 5, remove dead copper, pour order 22): 3050,4530 3050,4415 3050,4380 3040,4355 3040,4190 2865,4190 2855,4200 2855,4540 2785,4540 2775,4530 2770,4535 2770,4580 2740,4580 2730,4570 2735,4565 2735,4525 2675,4525 2610,4590 2610,4615 2290,4615 2065,4390 1800,4390 1800,4525 1955,4680 2740,4680 2750,4670 2750,4600 2840,4600 2895,4545 3025,4545
AGND on Top Layer "NONET_L-01_P-001" (hatched Horizontal grid 4 track 5, remove dead copper, pour order 7): 1520,4245 1595,4245 1710,4130 1710,3975 1750,3975 1782.5,3942.5 1862.5,3942.5 1870,3935 1965,4030 2135,4030 2140,4035 2150,4025 2150,3725 1300,3725 1300,4245
5V on Top Layer "NONET_L-01_P-001" (hatched Horizontal grid 4 track 5, remove dead copper, pour order 9): 1848.57,4280 1828.57,4280 1793.57,4280 1793.57,4255 1773.57,4235 1723.57,4235 1613.57,4345 1483.57,4345 1483.57,4255 1600,4255 1635,4225 1708.57,4155 1723.57,4170 1793.57,4170 1793.57,4230 1798.57,4235 1803.57,4230 1850,4230
DGND on Top Layer "NONET_L-01_P-001" (hatched Horizontal grid 4 track 5, remove dead copper, pour order 5): 1720,4115 1785,4115 1860,4115 1915,4060 2090,4060 2090,4040 2085,4035 1960,4035 1860,3935 1785,3935 1785,3950 1755,3980 1720,3980
DGND on Bottom Layer "NONET_L-01_P-001" (hatched Horizontal grid 4 track 5, remove dead copper, pour order 16): 3318.75,4688.75 3318.75,3539.43 1291.25,3539.43 1291.25,4681.25
AGND on Bottom Layer "NONET_L-01_P-001" (hatched Horizontal grid 4 track 5, remove dead copper, pour order 12): 1295,4250 1595,4250 1695,4150 1710,4150 1710,3985 1720,3975 1750,3975 1750,3970 1780,3940 1880,3940 1980,4040 2135,4040 2160,4015 2155,4010 2155,3730 1295,3730

## Other copper
Top Layer:
  pour cut-out: 2420,4265.96 2420,4290 2395,4315 2395,4375 2390,4380 2422.07,4412.07 2422.07,4412.93 2427.93,4412.93 2465,4450 2500,4450 2550,4400 2550,4395 2593.48,4351.52 2593.48,4313.48 2590,4310 2590,4270 2555,4235 2555,4210 2475.96,4210 2471.37,4214.59
  pour cut-out: 1422.08,4688.29 1521.43,4692.64 1521.43,4648.29 1521.43,4458.29 1311.43,4458.29 1311.43,4678.29 1311.43,4688.29
  pour cut-out: 3177.08,4683.29 3276.43,4687.64 3276.43,4643.29 3276.43,4453.29 3066.43,4453.29 3066.43,4673.29 3066.43,4683.29
  pour cut-out: 3172.08,3768.29 3271.43,3772.64 3271.43,3728.29 3271.43,3538.29 3061.43,3538.29 3061.43,3758.29 3061.43,3768.29
  pour cut-out: 1420.66,3760 1520,3764.35 1520,3720 1520,3530 1310,3530 1310,3750 1310,3760
Bottom Layer:
  pour cut-out: 1422.08,4688.29 1521.43,4692.64 1521.43,4648.29 1521.43,4458.29 1311.43,4458.29 1311.43,4678.29 1311.43,4688.29
  pour cut-out: 3177.08,4683.29 3276.43,4687.64 3276.43,4643.29 3276.43,4453.29 3066.43,4453.29 3066.43,4673.29 3066.43,4683.29
  pour cut-out: 3172.08,3768.29 3271.43,3772.64 3271.43,3728.29 3271.43,3538.29 3061.43,3538.29 3061.43,3758.29 3061.43,3768.29
  pour cut-out: 1422.08,3758.29 1521.43,3762.64 1521.43,3718.29 1521.43,3528.29 1311.43,3528.29 1311.43,3748.29 1311.43,3758.29

## Silkscreen, mask and mechanical layers (free items; w line width, h text height)
Top Overlay:
  text "HookWeightModule" at 1750,4625 h60
  text "GND" at 2855,4580 h30 r90
  text "Ver1.0" at 1750.05,4560 h60
  text "2026/8/28" at 1749.95,4505 h60
  text "6V" at 2855,4440 h30 r90
  text "5V" at 1302.57,4299.22 h30
  text "6V" at 2789.84,4215 h30
  text "GND" at 1302.57,4183.12 h30
  text "GND" at 2759.85,4123.16 h30
  text "IN+" at 1302.57,4060.33 h30
  text "TX" at 2789.84,4029.59 h30
  text "IN-" at 1302.57,3947.57 h30
  text "RX" at 2789.84,3931.74 h30
  text "GND" at 1302.57,3821.45 h30
  text "RST" at 2443.69,3584.59 h30
  text "DIO" at 2559.67,3584.59 h30
  text "CLK" at 2659.43,3584.59 h30
  text "GND" at 2767.32,3584.59 h30
  text "3V3" at 2876.75,3584.59 h30
Mechanical 1:
  the board outline again, w10